# EAGLE board gps10mhz (EAGLE 9.6.2)
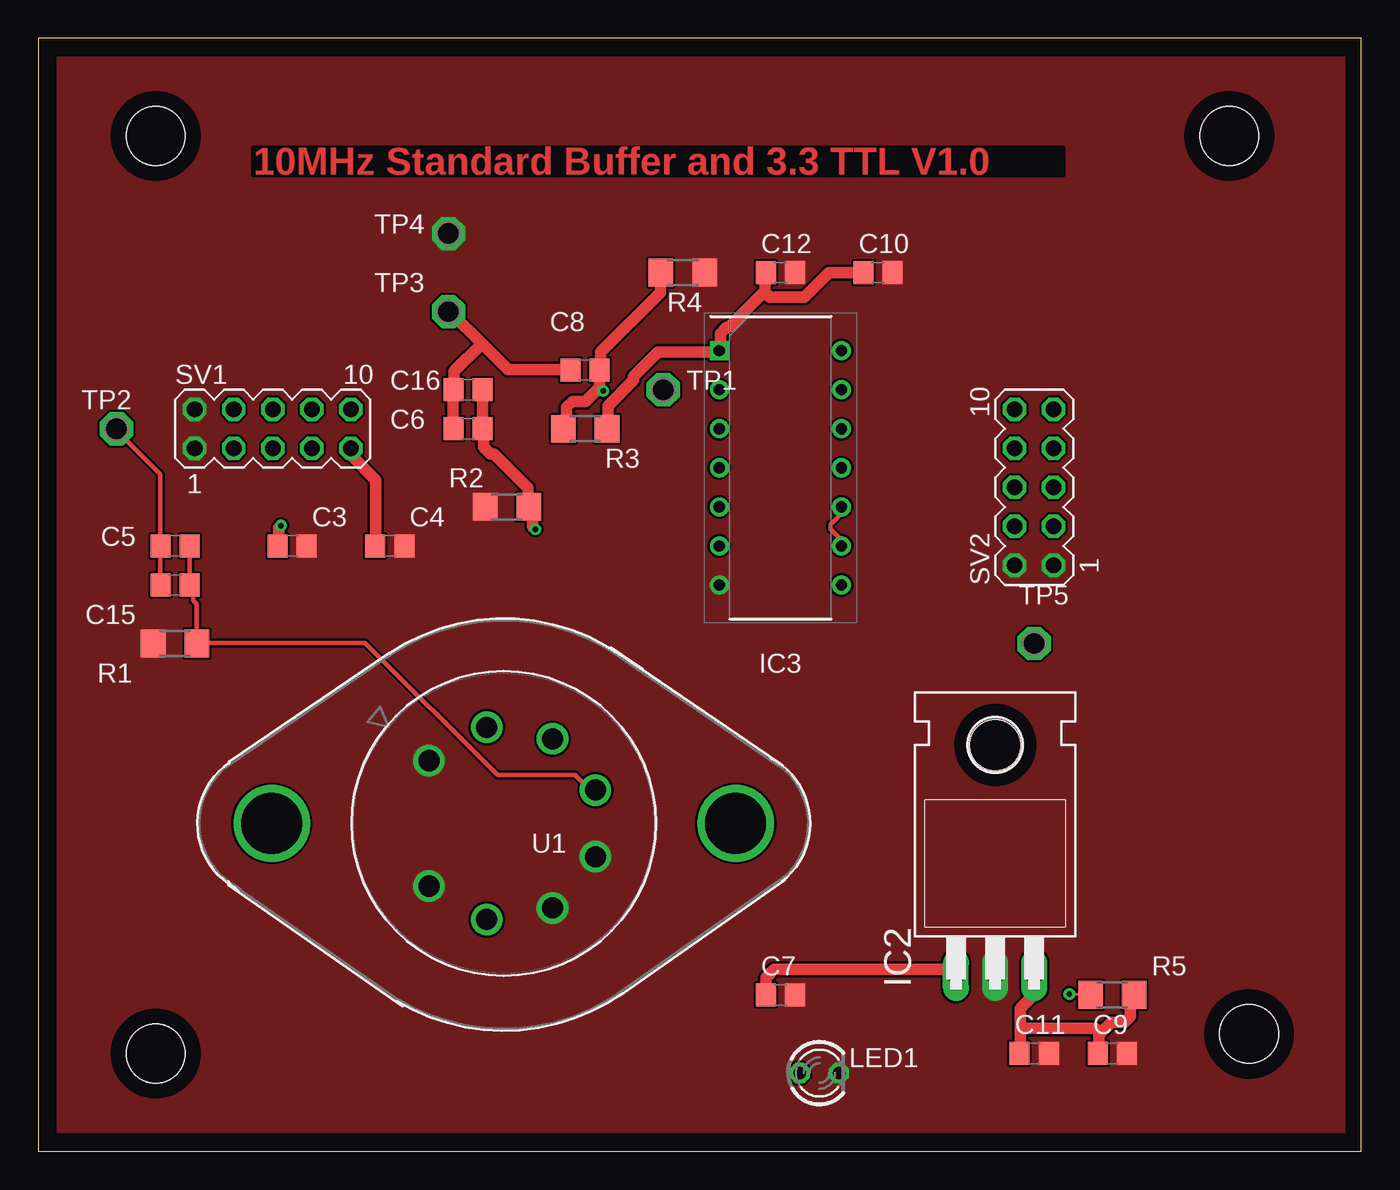
[diagram p0: board, top side]
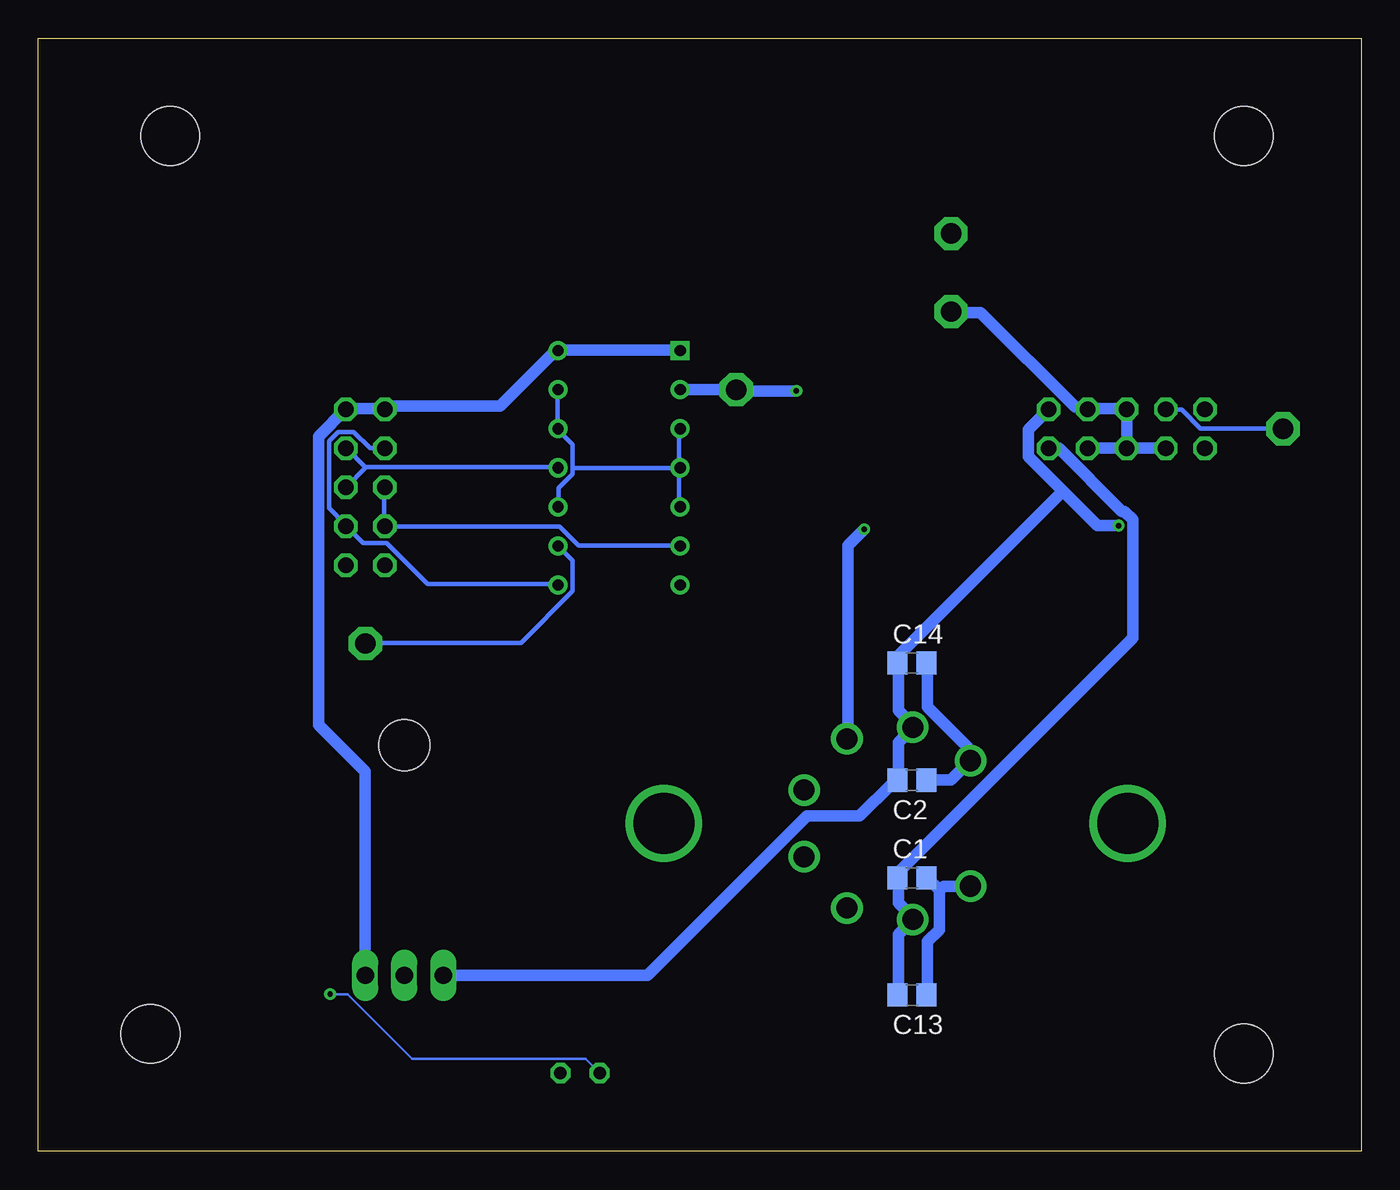
[diagram p1: board, bottom side, seen from below]

Size 86.03 x 72.38 mm. Coordinates in mm from the lower left corner, seen from the top.
Outline: 0,0 86.03,0 86.03,72.38 0,72.38 0,0
Copper layers (1*16): Top 0.035mm / dielectric 1.5mm / Bottom 0.035mm
Design rules "default": minimum track width 6mil, minimum drill 0.35mm, track to track 6mil, track to pad 6mil, pad to pad 6mil, via to via 6mil, smd to smd 6mil, copper to edge 40mil, drill to drill 6mil, minimum pad ring 10mil, minimum via ring 8mil, stop-mask expansion 4mil, vias tented up to drill 0mil, thermal gap 10mil
Net classes: 1 icurrent: width 0.305 mm; 2 wide: width 0.762 mm
Holes 3.81 mm at 7.62,6.35 78.74,7.62 77.47,66.04 7.62,66.04

## Footprints (pad centres in the part's own frame; a part is rotated, then mirrored left to right if it is on the bottom)
C0805 = smd 1.3 x 1.5: 1 -0.95,0; 2 0.95,0
TO220H = drill 1.118 long: 1 -2.54,-10.16; 2 0,-10.16; 3 2.54,-10.16 | hole 3.302: 0,4.826
DIP794W53P254L1930H508Q14N = drill 0.73 pad 1.13 square: 1 -3.97,7.62 | drill 0.73 pad 1.13: 2 -3.97,5.08; 3 -3.97,2.54; 4 -3.97,0; 5 -3.97,-2.54; 6 -3.97,-5.08; 7 -3.97,-7.62; 8 3.97,-7.62; 9 3.97,-5.08; 10 3.97,-2.54; 11 3.97,0; 12 3.97,2.54; 13 3.97,5.08; 14 3.97,7.62
LED3MM = drill 0.813 octagon: A -1.27,0; K 1.27,0
R1206 = smd 1.6 x 1.803: 1 -1.422,0; 2 1.422,0
MA05-2 = drill 1.016 octagon: 1 -5.08,-1.27; 2 -5.08,1.27; 3 -2.54,-1.27; 4 -2.54,1.27; 5 0,-1.27; 6 0,1.27; 7 2.54,-1.27; 8 2.54,1.27; 9 5.08,-1.27; 10 5.08,1.27
P1-13 = drill 1.321 pad 2.159 octagon: TP 0,0
LMF8_TEX = drill 1.372 pad 1.88: 1 0,0; 2 3.762,2.172; 3 8.039,1.418; 4 10.831,-1.91; 5 10.831,-6.253; 6 8.039,-9.581; 7 3.762,-10.335; 8 0,-8.163 | drill 3.962 pad 3.962: 9 19.952,-4.082; 10 -10.223,-4.082

## Placement (x,y rotation side)
C1  0.1uf  [C0805]  29.21,17.78 0 bottom
C2  0.1uf  [C0805]  29.21,24.13 0 bottom
C3  10uf  [C0805]  16.51,39.37 0 top
C4  10uf  [C0805]  22.86,39.37 0 top
C5  0.1uf  [C0805]  8.89,39.37 180 top
C6  0.1uf  [C0805]  27.94,46.99 0 top
C7  0.1uf  [C0805]  48.26,10.16 0 top
C8  0.1uf  [C0805]  35.56,50.8 180 top
C9  0.1uf  [C0805]  69.85,6.35 0 top
C10  0.1uf  [C0805]  54.61,57.15 0 top
C11  10uf  [C0805]  64.77,6.35 0 top
C12  10uf  [C0805]  48.26,57.15 0 top
C13  0.01uf  [C0805]  29.21,10.16 0 bottom
C14  0.01uf  [C0805]  29.21,31.75 0 bottom
C15  0.01uf  [C0805]  8.89,36.83 180 top
C16  0.01uf  [C0805]  27.94,49.53 0 top
IC2  7803.3  [TO220H]  62.23,21.59 0 top
IC3  CD74HC132E  [DIP794W53P254L1930H508Q14N]  48.26,44.45 0 top
LED1  TLLR4400  [LED3MM]  50.8,5.08 0 top
R1  1000  [R1206]  8.89,33.02 0 top
R2  1000  [R1206]  30.48,41.91 0 top
R3  1000  [R1206]  35.56,46.99 0 top
R4  1000  [R1206]  41.91,57.15 180 top
R5  1000  [R1206]  69.85,10.16 0 top
SV1  IO_PWR  [MA05-2]  15.24,46.99 0 top
SV2  TTL_3.3V  [MA05-2]  64.77,43.18 90 top
TP1  PTR1PAD1-13  [P1-13]  40.64,49.53 0 top
TP2  PTR1PAD1-13  [P1-13]  5.08,46.99 0 top
TP3  PTR1PAD1-13  [P1-13]  26.67,54.61 0 top
TP4  PTR1PAD1-13  [P1-13]  26.67,59.69 0 top
TP5  PTR1PAD1-13  [P1-13]  64.77,33.02 0 top
U1  BB3553AM  [LMF8_TEX]  25.4,25.4 0 top

## Library data of the parts
C1-C16 = rcl; SPICEPREFIX: C
IC2 = linear
IC3 = CD74HC132E; DESCRIPTION: High Speed CMOS Logic Quad 2-Input Schmitt-Triggered NAND Gates; HEIGHT: 5.08mm; MANUFACTURER_NAME: Texas Instruments; MANUFACTURER_PART_NUMBER: CD74HC132E; MOUSER_PART_NUMBER: 595-CD74HC132E; MOUSER_PRICE-STOCK: https://www.mouser.co.uk/ProductDetail/Texas-Instruments/CD74HC132E?qs=pt%2FIv5r0EPf0PBWbsCsSEA%3D%3D
LED1 = led; MF: VISHAY SEMICONDUCTOR; OC_FARNELL: 1612437
R1-R5 = rcl; SPICEPREFIX: R
SV1 SV2 = con-lstb; OC_FARNELL: unknown; OC_NEWARK: unknown
TP1-TP5 = testpad
U1 = 2025-01-01_18-24-55_Library; COPYRIGHT: Copyright (C) 2025 Ultra Librarian. All rights reserved.; MANUFACTURER_PART_NUMBER: OPA2541AM; MFR_NAME: Texas Instruments

## Nets
0V [wide]: C1.2 C2.2 C3.2 C4.2 C7.2 C9.2 C10.2 C11.2 C12.2 C13.2 C14.2 IC2.2 IC3.7 LED1.K R1.1 R2.1 R4.1 SV1.1 SV1.2 SV2.1 SV2.2 TP4.TP U1.1 U1.5 U1.6 U1.8
10MHZ_IN [icurrent]: C5.2 C15.2 SV1.4 TP2.TP
10MHZ_OUT [wide]: C6.1 C8.2 C16.1 SV1.3 SV1.5 SV1.6 SV1.7 SV1.8 TP3.TP
+3V3 [wide]: C9.1 C10.1 C11.1 C12.1 IC2.3 IC3.1 IC3.14 R3.2 R5.2 SV2.9 SV2.10
+15V [wide]: C2.1 C3.1 C7.1 C14.1 IC2.1 SV1.10 U1.2
-15V [wide]: C1.1 C4.1 C13.1 SV1.9 U1.7
IN [icurrent]: C5.1 C15.1 R1.2 U1.4
N$1: LED1.A R5.1
N$2 [icurrent]: IC3.6 SV2.4 SV2.6
N$3 [icurrent]: IC3.8 SV2.3 SV2.8
N$4 [icurrent]: IC3.11 SV2.5 SV2.7
OUT [wide]: C6.2 C16.2 R2.2 U1.3
SINE_IN [wide]: C8.1 IC3.2 R3.1 R4.2 TP1.TP
TTL [icurrent]: IC3.3 IC3.4 IC3.5 IC3.9 IC3.10 IC3.12 IC3.13 TP5.TP

## Tracks (layer width: path | path; a pad name or v marks a point on that pad's centre or on a via)
0V
  Bottom 0.762: 27.43,16.99 27.43,14.4 28.19,13.64 28.19,10.21 C13.2 | 27.43,16.99 28.19,17.75 C1.2 | C2.2 28.19,24.16 26.67,24.16 25.45,25.38 U1.1 25.53,25.76 25.53,26.21 28.19,28.88 28.19,31.7 C14.2 | 27.43,16.99 27.13,17.22 25.45,17.22 U1.8
  pour Top (no thermals): 1.27,71.12 85.09,71.12 85.09,1.27 1.27,1.27
10MHZ_IN
  Top 0.305: C15.2 7.92,36.88 7.92,39.32 C5.2 7.92,39.47 7.92,44.04 5.03,46.94 TP2.TP
  Bottom 0.305: SV1.4 12.65,48.23 11.66,48.23 10.44,47.02 5.11,47.02 TP2.TP
10MHZ_OUT
  Top 0.762: C6.1 26.98,47.02 26.98,49.53 C16.1 27.05,49.84 27.05,50.75 28.84,52.54 | 28.84,52.54 26.82,54.56 26.67,54.56 TP3.TP | 28.84,52.54 30.56,50.83 34.59,50.83 C8.2
  Bottom 0.762: SV1.5 SV1.3 | SV1.5 SV1.6 15.54,48.31 17.75,48.31 SV1.8 18.14,48.39 18.59,48.39 24.77,54.56 26.67,54.56 TP3.TP | SV1.5 SV1.7
+3V3
  Top 0.762: 69.08,7.66 69.8,8.38 70.64,8.38 71.02,8.76 71.02,9.91 71.25,10.13 R5.2 | 69.08,7.66 68.96,7.54 68.96,6.4 C9.1 | 63.86,8 63.86,9.3 64.77,10.21 IC2.3 | 63.86,8 63.86,6.4 C11.1 | 63.86,8 68.73,8 69.08,7.66 | 47.24,55.93 47.24,57.15 C12.1 | 47.24,55.93 44.88,53.57 44.73,53.57 44.35,53.19 44.35,52.12 IC3.1 43.97,51.97 40.31,51.97 38.71,50.37 38.71,50.14 37.03,48.46 37.03,47.02 R3.2 | C10.1 51.44,57.15 49.84,55.55 47.55,55.55 47.47,55.63 47.24,55.93
  Bottom 0.762: IC3.1 44.35,52.12 52.2,52.12 IC3.14 52.58,51.89 56.01,48.46 63.17,48.46 SV2.10 63.55,48.31 65.99,48.31 SV2.9 67.82,46.48 67.82,27.74 64.77,24.69 IC2.3
+15V  (via drill 0.35)
  Top 0.762: C7.1 47.32,10.21 47.32,11.28 47.85,11.81 59.28,11.81 59.66,11.43 IC2.1 | v15.77,40.69 15.62,40.54 15.62,39.4 C3.1
  Bottom 0.762: v15.77,40.69 17.14,40.69 19.39,42.94 | 19.39,42.94 21.64,45.19 21.64,46.94 SV1.10 | 19.39,42.94 30.02,32.31 30.02,32.08 C14.1 30.1,31.7 30.1,28.65 29.34,27.89 U1.2 29.18,27.51 30.1,26.59 30.1,24.16 C2.1 30.48,23.93 32.61,21.79 36.04,21.79 46.41,11.43 IC2.1
-15V
  Top 0.762: C4.1 21.95,39.4 21.95,43.66 20.34,45.26 20.34,45.72 SV1.9
  Bottom 0.762: C13.1 30.1,10.21 30.1,14.1 29.18,15.01 U1.7 29.34,15.39 30.1,16.15 30.1,17.75 C1.1 30.1,18.14 14.86,33.38 14.86,41.07 15.39,41.6 15.54,41.6 19.66,45.72 SV1.9
IN
  Top 0.305: C5.1 9.83,39.32 9.83,36.88 C15.1 9.91,36.73 10.06,36.58 10.06,35.81 10.29,35.59 10.29,33.07 R1.2 10.44,33.07 21.26,33.07 29.87,24.46 34.9,24.46 35.81,23.55 36.2,23.55 U1.4
N$1  (via drill 0.35)
  Top 0.152: v67.06,10.21 68.43,10.21 R5.1
  Bottom 0.152: v67.06,10.21 65.91,10.21 61.72,6.02 50.44,6.02 49.53,5.11 LED1.A
N$2
  Bottom 0.305: IC3.6 44.35,39.4 50.9,39.4 52.12,40.62 63.48,40.62 SV2.4 63.55,40.77 63.55,43.13 SV2.6
N$3
  Bottom 0.305: IC3.8 52.27,36.88 60.73,36.88 63.4,39.55 64.92,39.55 65.99,40.62 SV2.3 66.06,40.77 67.13,41.83 67.13,46.18 66.52,46.79 65.53,46.79 64.47,45.72 SV2.8
N$4
  Bottom 0.305: 64.77,44.5 52.27,44.5 IC3.11 | 64.77,44.5 65.99,45.72 SV2.7 | SV2.5 65.99,43.2 64.77,44.42 64.77,44.5
OUT  (via drill 0.35)
  Top 0.762: C16.2 28.88,47.02 C6.2 29.11,46.71 28.96,46.56 28.96,45.8 29.41,45.34 29.64,45.34 31.85,43.13 31.85,41.91 R2.2 32.16,41.68 32.16,40.62 v32.31,40.46
  Bottom 0.762: v32.31,40.46 33.38,39.4 33.38,26.82 U1.3
SINE_IN  (via drill 0.35)
  Top 0.762: 36.5,49.68 36.5,50.75 C8.1 36.58,51.13 36.58,51.97 40.46,55.85 40.46,57.15 R4.2 | 36.5,49.68 35.59,48.77 34.75,48.77 34.37,48.39 34.37,47.17 34.21,47.02 R3.1 | v36.73,49.45 36.5,49.68
  Bottom 0.762: IC3.2 TP1.TP 40.31,49.45 v36.73,49.45
TTL
  Top 0.305: IC3.9 52.2,39.4 52.2,39.78 51.51,40.46 51.51,40.77 52.2,41.45 52.2,41.91 IC3.10
  Bottom 0.305: IC3.5 44.35,41.91 44.35,44.42 IC3.4 | IC3.3 44.35,46.94 44.35,44.58 IC3.4 | IC3.13 52.27,49.53 52.27,47.02 IC3.12 52.2,46.86 51.28,45.95 51.28,44.42 | 51.28,44.42 51.28,44.04 52.2,43.13 52.2,41.91 IC3.10 | 51.28,44.42 44.5,44.42 IC3.4 | TP5.TP 64.77,33.07 54.63,33.07 51.28,36.42 51.28,38.41 52.2,39.32 IC3.9

## Text on the board
Top: 10MHz Standard Buffer and 3.3 TTL V1.0